# Altium PCB pcb_take2.PcbDoc (part 2 of 3)
Units mm, origin at the board's own origin, x right, y up, seen from the top; angles counter-clockwise.
Board outline 120 x 150 mm, 8 copper layers (Top Layer, Power plane, Mid-Layer 1, Mid-Layer 2, Mid-Layer 3, MidLayer4, GND plane, Bottom Layer); 176 components, 197 nets, 1014 pads, 576 vias.
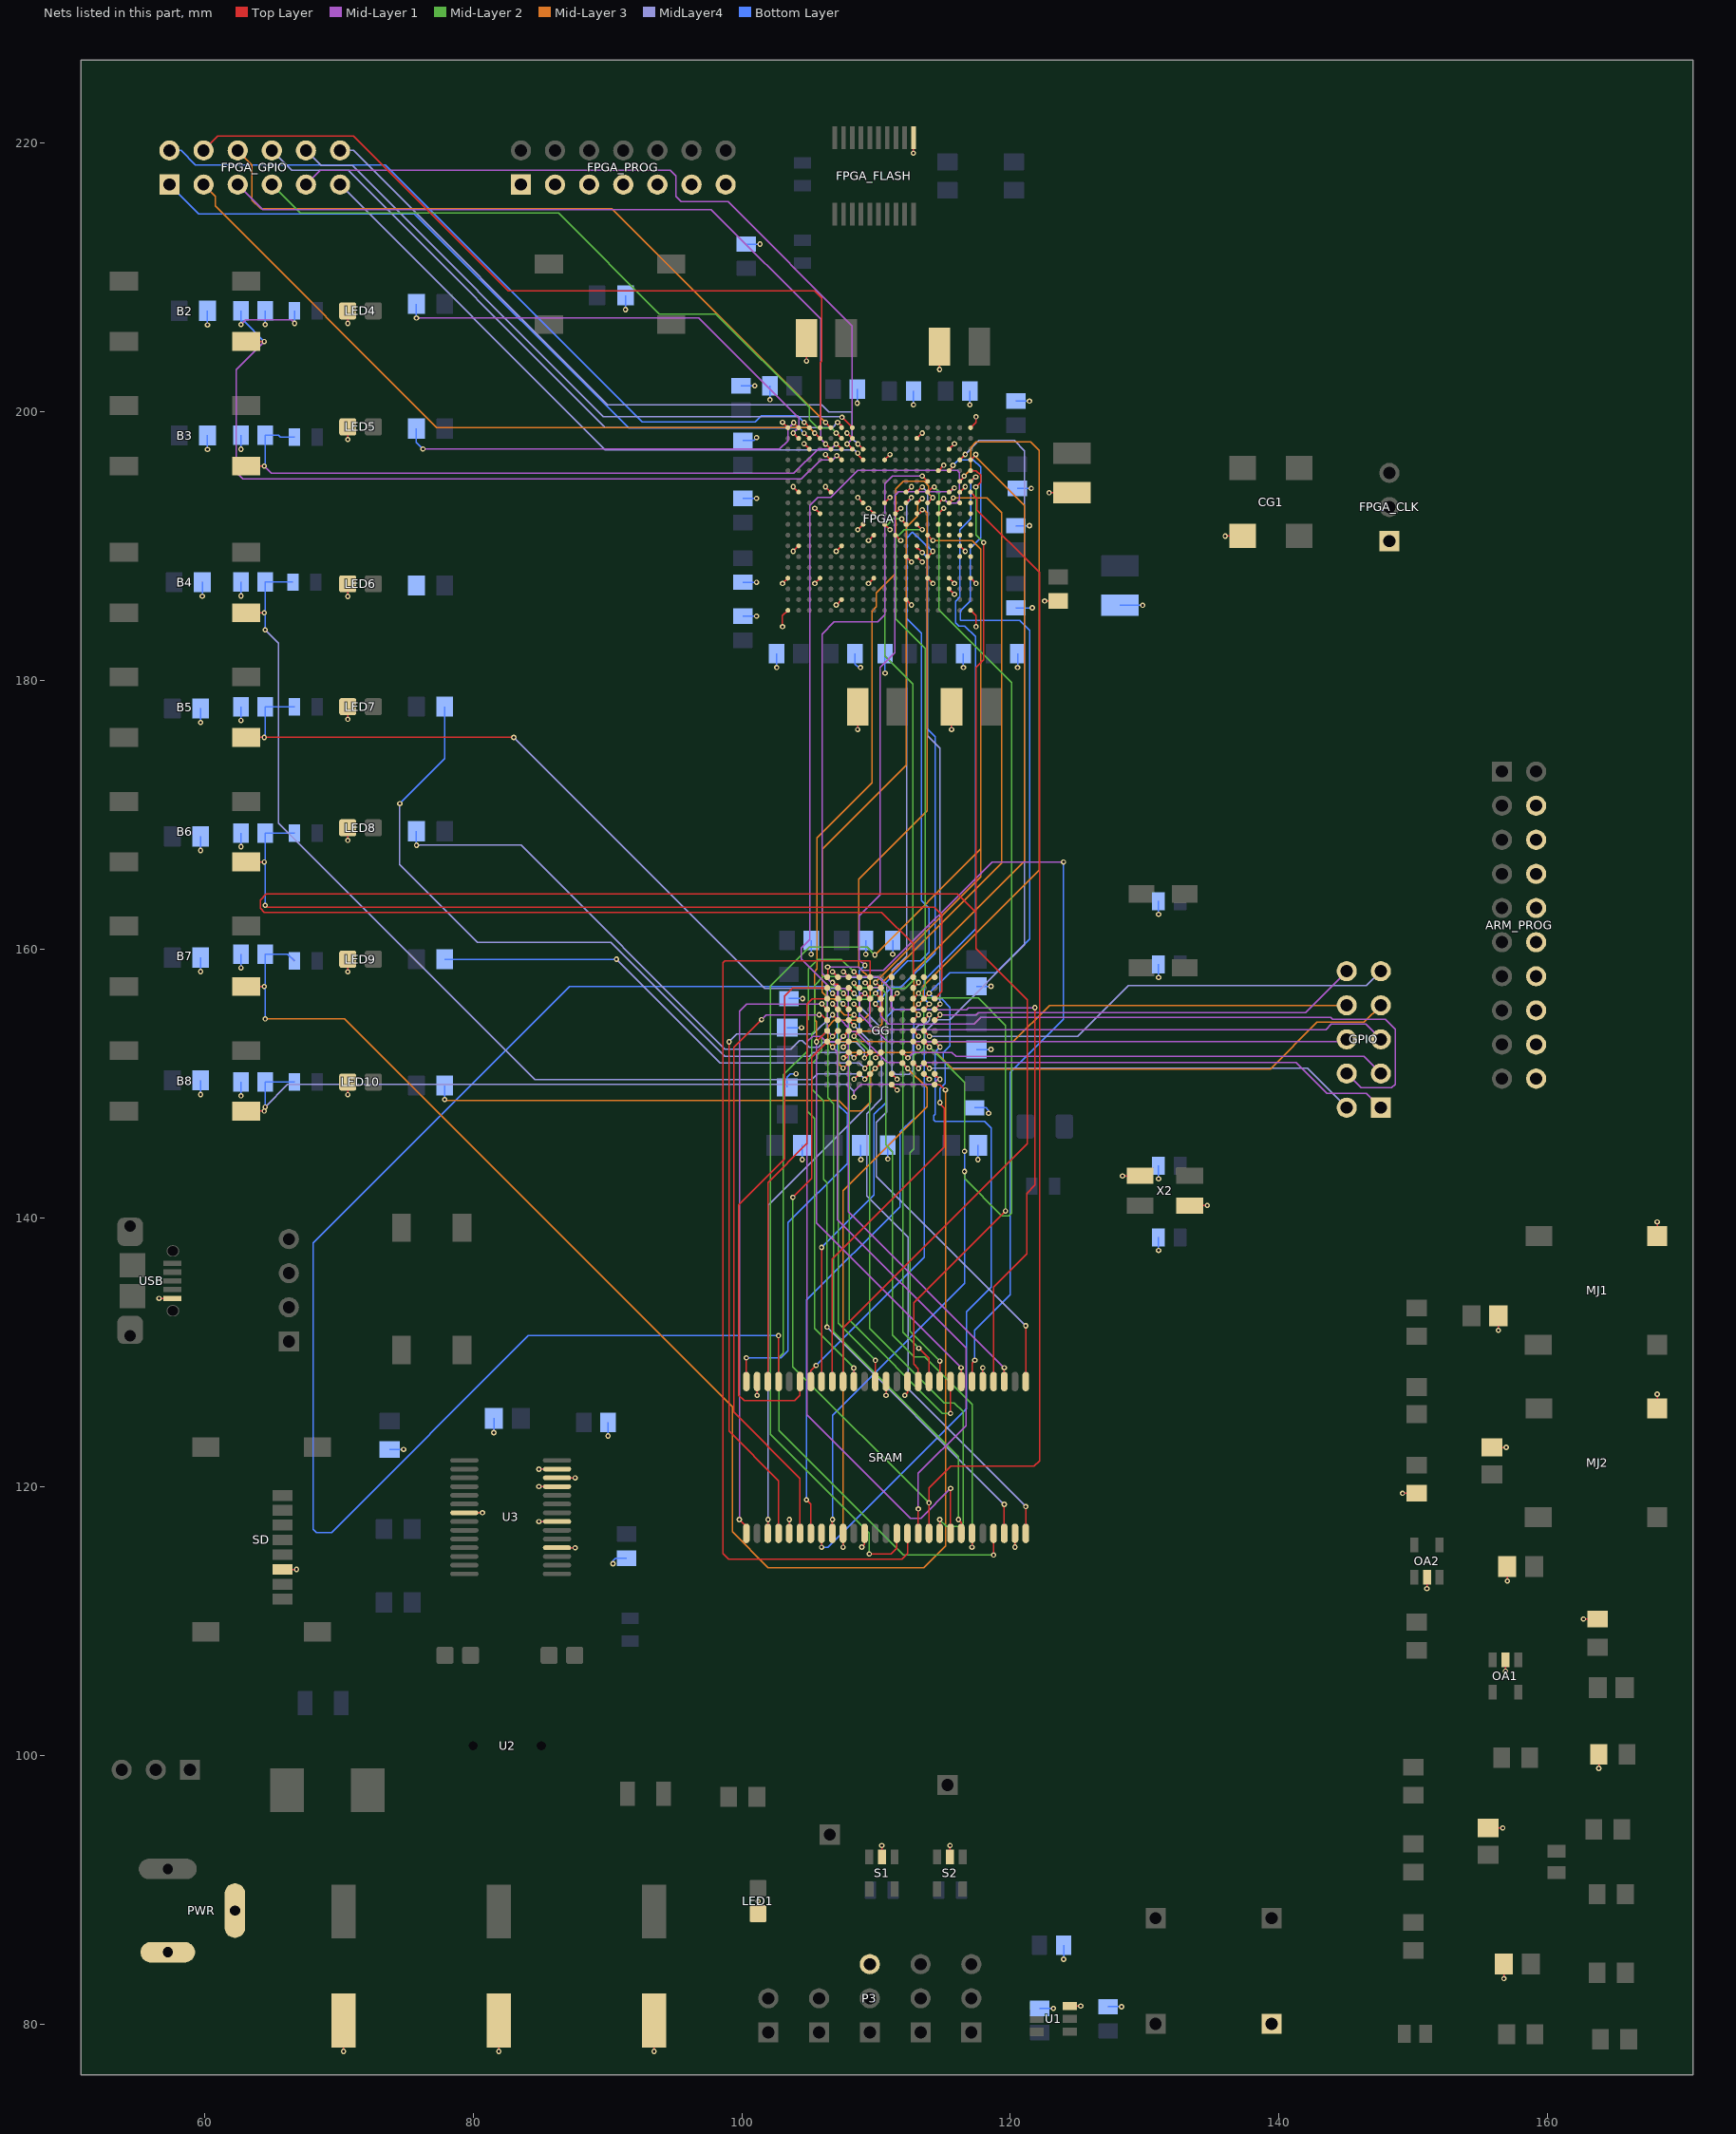
[diagram p8: the nets of this part, all layers, seen from the top]

## Via types
v1: diameter 0.4, hole 0.2, Top Layer to Bottom Layer, 576 vias

## Nets (pads, with @x,y where several pads share a name; then routed paths per layer and width w, separated by ;. In a path a pad name is that pad's centre, name@x,y a point inside that pad or via, vN(x,y) a via of type N, cw(c..) or ccw(c..) an arc to the next point about the centre after c; other vN are vias at no path point) (continued)
EBI_A4: FPGA.F14 GG.J8 SRAM.10 | length 94.8
  Top Layer w0.1: v1(107.544,115.494) SRAM.10@107.544,116.524 ; GG.J8@111.963,151.524 v1(112.363,151.124) ; v1(113.436,195.224) FPGA.F14@113.836,194.824
  Mid-Layer 1 w0.1: v1(112.363,151.124) 111.925,151.562 110.821,151.562 108.509,153.874 108.229,153.874 107.112,154.992 107.112,157.099 105.994,158.217 105.994,183.464 106.883,184.353 110.134,184.353 110.668,184.887 110.668,194.666 111.227,195.224 v1(113.436,195.224)
  Mid-Layer 3 w0.1: v1(107.544,115.494) 107.544,142.041 113.792,148.29 113.792,149.695 v1(112.363,151.124)
EBI_A5: FPGA.G14 GG.G10 SRAM.9 | length 104.3
  Top Layer w0.1: SRAM.9@106.744,116.524 106.744,117.539 v1(106.756,117.551) ; GG.G10@113.563,153.124 v1(113.963,152.724) ; FPGA.G14@113.836,194.024 114.224,194.412 v1(114.325,194.412)
  Mid-Layer 2 w0.1: v1(113.963,152.724) 116.586,150.101 v1(116.586,144.958) ; v1(114.325,194.412) 114.681,194.056 114.681,185.242 120.091,179.832 120.091,140.36 119.888,140.157 119.362,140.157 116.586,142.933 v1(116.586,143.459)
  Bottom Layer w0.1: v1(106.756,117.551) 106.756,125.324 116.586,135.153 v1(116.586,143.459) v1(116.586,144.958)
EBI_A6: FPGA.D17 GG.G11 SRAM.8 | length 103
  Top Layer w0.1: v1(105.944,115.494) SRAM.8@105.944,116.524 ; GG.G11@114.363,153.124 v1(114.763,152.724) ; FPGA.D17@116.236,196.424 v1(116.637,196.825)
  MidLayer4 w0.1: v1(114.763,152.724) 114.35,153.137 113.792,153.137 113.614,153.314 113.614,153.822 114.56,154.768 115.503,154.768 121.056,160.321 121.056,197.104 120.304,197.857 117.669,197.857 v1(116.637,196.825)
  Bottom Layer w0.1: v1(105.944,115.494) 106.429,115.494 116.738,125.803 116.738,133.02 118.567,134.849 118.567,146.71 118.079,147.199 114.402,147.199 114.3,147.3 114.3,147.615 114.402,147.717 114.402,152.363 v1(114.763,152.724)
EBI_A7: FPGA.D18 GG.E9 SRAM.7 | length 90.1
  Top Layer w0.1: v1(104.826,119.024) 105.144,118.706 SRAM.7@105.144,116.524 ; GG.E9@112.763,154.724 v1(113.163,155.124) ; FPGA.D18@117.036,196.424 117.036,196.436 v1(117.424,196.825)
  Mid-Layer 3 w0.1: v1(113.163,155.124) 112.801,155.486 112.801,158.318 121.056,166.573 121.056,193.015 117.424,196.647 v1(117.424,196.825)
  Bottom Layer w0.1: v1(104.826,119.024) 104.826,133.883 111.785,140.843 111.785,146.4 112.801,147.416 112.801,154.762 v1(113.163,155.124)
EBI_A8: FPGA.H12 GG.E10 SRAM.48 | length 82
  Top Layer w0.1: SRAM.48@105.144,127.824 105.144,128.626 v1(105.537,129.019) ; FPGA.H12@112.236,193.224 112.236,193.237 v1(112.624,193.624) ; GG.E10@113.563,154.724 v1(113.963,155.124)
  MidLayer4 w0.1: v1(112.624,193.624) 112.624,193.523 112.268,193.167 112.268,159.505 111.201,158.438 111.201,150.978 111.481,150.698 112.446,150.698 112.725,150.978 112.725,153.873 113.203,154.351 113.589,154.351 113.963,154.725 v1(113.963,155.124)
  Bottom Layer w0.1: v1(105.537,129.019) 113.589,137.07 113.589,154.75 v1(113.963,155.124)
EBI_A9: FPGA.G13 GG.D11 SRAM.47 | length 73.7
  Top Layer w0.1: SRAM.47@105.944,127.824 v1(105.944,137.807) ; FPGA.G13@113.036,194.024 113.424,194.412 v1(113.436,194.412) ; GG.D11@114.363,155.524 v1(114.763,155.924)
  MidLayer4 w0.1: v1(113.436,194.412) 113.843,194.005 113.843,175.895 114.763,174.975 v1(114.763,155.924)
  Bottom Layer w0.1: v1(105.944,137.807) 109.855,141.718 109.855,147.701 110.744,148.59 110.744,154.915 111.354,155.524 114.363,155.524 v1(114.763,155.924)
EBI_A10: FPGA.E16 GG.C10 SRAM.46 | length 87.6
  Top Layer w0.1: SRAM.46@106.744,127.824 106.744,136.931 115.087,145.275 115.087,148.184 114.757,148.514 v1(114.757,148.59) ; v1(113.944,156.718) 113.563,156.337 GG.C10@113.563,156.324 v1(113.957,156.718) ; FPGA.E16@115.436,195.624 115.722,195.91 v1(115.722,196.012)
  Bottom Layer w0.1: v1(113.944,156.718) 114.351,156.312 114.884,156.312 115.513,155.683 115.513,152.826 115.011,152.324 115.011,151.663 115.138,151.536 115.138,150.001 114.757,149.62 v1(114.757,148.59) ; v1(113.957,156.718) 115.481,158.242 118.923,158.242 121.437,160.757 121.437,183.744 120.701,184.48 116.296,184.48 116.27,184.506 116.27,185.18 117.018,185.928 117.018,189.856 117.78,190.618 117.78,195.885 117.246,196.418 116.129,196.418 v1(115.722,196.012)
EBI_A11: FPGA.E18 GG.A9 SRAM.45 | length 183.1
  Top Layer w0.1: SRAM.45@107.544,127.824 107.544,131.826 121.26,145.542 121.26,156.235 117.45,160.045 117.45,162.738 ; GG.A9@112.763,157.924 112.763,160.408 110.414,162.758 64.463,162.758 64.16,163.06 64.16,163.652 64.618,164.109 116.078,164.109 117.45,162.738 ; FPGA.E18@117.036,195.624 117.45,195.624 117.78,195.294 117.78,194.767 v1(117.424,194.412) ; v1(118.008,190.271) 118.008,181.534 117.45,180.975 117.45,162.738
  Mid-Layer 2 w0.1: v1(117.424,194.412) 117.424,190.856 v1(118.008,190.271)
EBI_A12: FPGA.K12 GG.B9 SRAM.44 | length 77.2
  Top Layer w0.1: SRAM.44@108.344,127.824 v1(108.344,128.829) ; v1(111.912,192.024) 111.912,191.948 FPGA.K12@112.236,191.624 ; GG.B9@112.763,157.124 v1(113.163,157.524)
  Mid-Layer 2 w0.1: v1(108.344,128.829) 105.41,131.763 105.41,147.396 104.851,147.955 104.851,151.663 105.207,152.019 105.207,153.695 105.41,153.899 105.41,157.302 106.07,157.963 110.109,157.963 110.973,157.099 112.166,157.099 112.725,157.658 112.725,157.962 ; v1(111.912,192.024) 111.277,192.024 110.668,191.414 110.668,181.813 112.725,179.756 112.725,157.962 ; v1(113.163,157.524) 112.725,157.962
EBI_A13: FPGA.K13 GG.C9 SRAM.38 | length 75.3
  Top Layer w0.1: GG.C9@112.763,156.324 v1(113.163,156.724) ; FPGA.K13@113.036,191.624 113.423,191.237 v1(113.436,191.237) ; SRAM.38@113.144,127.824 113.144,128.79 112.805,129.129 112.805,133.69 v1(119.634,140.518)
  Mid-Layer 2 w0.1: v1(113.436,191.237) 112.116,191.237 111.481,190.602 111.481,184.582 113.655,182.408 113.655,157.216 v1(113.163,156.724) 113.525,156.362 117.602,156.362 119.634,154.33 v1(119.634,140.518)
EBI_A14: FPGA.F17 GG.D9 SRAM.37 | length 83.6
  Top Layer w0.1: GG.D9@112.763,155.524 v1(113.163,155.924) ; v1(113.182,130.302) 113.944,129.54 SRAM.37@113.944,127.824 ; FPGA.F17@116.236,194.824 116.561,195.149 v1(116.561,195.224)
  Mid-Layer 2 w0.1: v1(113.163,155.924) 112.738,155.499 112.141,155.499 111.989,155.346 111.989,131.496 v1(113.182,130.302)
  Mid-Layer 3 w0.1: v1(113.163,155.924) 113.525,156.286 113.525,157.264 122.149,165.887 122.149,197.129 121.514,197.764 117.45,197.764 117.043,197.358 117.043,195.707 v1(116.561,195.224)
EBI_A15: FPGA.F18 GG.D10 SRAM.36 | length 73.3
  Top Layer w0.1: GG.D10@113.563,155.524 v1(113.963,155.924) ; SRAM.36@114.744,127.824 v1(114.744,129.35) ; FPGA.F18@117.036,194.824 117.36,195.148 v1(117.424,195.148)
  Mid-Layer 2 w0.1: v1(113.963,155.924) 113.538,155.499 113.538,152.603 113.208,152.273 112.979,152.273 112.801,152.095 112.801,145.136 112.522,144.856 112.522,131.572 v1(114.744,129.35)
  Bottom Layer w0.1: v1(113.963,155.924) 113.589,156.298 113.589,157.683 117.399,161.493 117.399,183.261 116.608,184.052 116.166,184.052 115.916,184.302 115.916,185.895 116.256,186.234 116.256,191.237 117.069,192.049 117.069,194.793 v1(117.424,195.148)
EBI_A16: FPGA.H13 GG.E4 SRAM.35 | length 79.9
  Top Layer w0.1: v1(108.367,155.12) GG.E4@108.763,154.724 ; FPGA.H13@113.036,193.224 113.352,193.54 v1(113.436,193.54) ; v1(115.544,125.451) SRAM.35@115.544,127.824
  Mid-Layer 2 w0.1: v1(108.367,155.12) 108.001,154.754 108.001,132.398 114.949,125.451 v1(115.544,125.451)
  Mid-Layer 3 w0.1: v1(108.367,155.12) 107.643,155.12 107.112,155.651 107.112,156.083 106.883,156.312 106.477,156.312 105.994,156.794 105.994,167.437 112.243,173.685 112.243,191.414 113.081,192.253 113.081,193.184 v1(113.436,193.54)
EBI_A17: FPGA.H14 GG.F1 SRAM.34 | length 79
  Top Layer w0.1: v1(105.562,153.111) 105.562,153.123 GG.F1@106.363,153.924 ; FPGA.H14@113.836,193.224 v1(114.23,193.618) ; v1(116.332,128.854) 116.344,128.842 SRAM.34@116.344,127.824
  Mid-Layer 1 w0.1: v1(105.562,153.111) 105.562,139.624 v1(116.332,128.854)
  Mid-Layer 3 w0.1: v1(105.562,153.111) 105.562,154.615 105.416,154.762 105.416,158.324 105.613,158.521 105.613,168.303 109.703,172.393 109.703,185.166 110.033,185.496 110.033,186.523 111.481,187.971 111.481,194.259 112.039,194.818 113.589,194.818 113.919,194.488 113.919,193.929 v1(114.23,193.618)
EBI_A18: FPGA.H15 GG.F2 SRAM.21 | length 98.8
  Top Layer w0.1: v1(106.756,153.518) GG.F2@107.163,153.924 ; FPGA.H15@114.636,193.224 114.952,193.54 v1(115.037,193.54) ; v1(116.129,117.551) 116.344,117.336 SRAM.21@116.344,116.524
  Mid-Layer 1 w0.1: v1(106.756,153.518) 106.375,153.899 106.375,157.335 104.445,159.265 104.445,160.078 105.08,160.713 105.08,193.04 105.664,193.624 106.629,193.624 108.636,195.631 116.053,195.631 116.205,195.478 116.205,193.446 115.976,193.218 115.359,193.218 v1(115.037,193.54)
  Mid-Layer 2 w0.1: v1(106.756,153.518) 106.401,153.162 106.401,148.946 106.832,148.514 106.832,131.521 116.129,122.225 v1(116.129,117.551)
EBI_A19: FPGA.H16 GG.F3 SRAM.20 | length 99.3
  Top Layer w0.1: v1(107.563,153.524) GG.F3@107.963,153.924 ; FPGA.H16@115.436,193.224 115.748,193.536 v1(115.748,193.599) ; SRAM.20@115.544,116.524 v1(115.545,119.862)
  Mid-Layer 1 w0.1: v1(107.563,153.524) 107.176,153.137 106.288,153.137 105.893,153.532 105.272,153.532 104.858,153.118 104.858,125.342 112.547,117.653 113.335,117.653 v1(115.545,119.862)
  Mid-Layer 3 w0.1: v1(107.563,153.524) 107.938,153.899 109.906,153.899 110.439,154.432 110.439,157.513 119.355,166.429 119.355,192.507 118.262,193.599 v1(115.748,193.599)
EBI_A20: FPGA.G16 GG.F4 SRAM.19 | length 90.7
  Top Layer w0.1: v1(108.363,153.524) GG.F4@108.763,153.924 ; v1(114.732,117.551) 114.744,117.539 SRAM.19@114.744,116.524 ; FPGA.G16@115.436,194.024 115.752,194.34 v1(115.824,194.34)
  Mid-Layer 1 w0.1: v1(109.169,158.801) 108.763,159.207 108.763,162.484 110.312,164.033 110.312,180.975 111.404,182.067 111.404,193.777 111.684,194.056 115.54,194.056 v1(115.824,194.34)
  Mid-Layer 2 w0.1: v1(108.363,153.524) 109.519,152.368 109.519,131.794 115.076,126.238 115.824,126.238 116.484,125.578 116.484,117.272 116.256,117.043 115.24,117.043 v1(114.732,117.551)
  Bottom Layer w0.1: v1(108.363,153.524) 108.763,153.924 108.763,158.394 v1(109.169,158.801)
EBI_A21: FPGA.G18 GG.G1 SRAM.18 | length 126.3
  Top Layer w0.1: v1(103.81,141.529) 105.212,142.931 105.212,151.973 GG.G1@106.363,153.124 ; SRAM.18@113.944,116.524 v1(113.944,118.796) 113.944,119.888 115.57,121.514 121.768,121.514 122.174,121.92 122.174,188.036 117.526,192.684 117.526,193.534 FPGA.G18@117.036,194.024
  Mid-Layer 2 w0.1: v1(103.81,141.529) 103.81,128.93 v1(113.944,118.796)
EBI_A22: FPGA.J13 GG.G2 SRAM.17 | length 88.3
  Top Layer w0.1: v1(106.756,152.73) v1@106.769,152.73 ; v1(106.763,152.724) v1@106.769,152.73 ; GG.G2@107.163,153.124 v1@106.769,152.73 ; FPGA.J13@113.036,192.424 113.233,192.424 v1(113.436,192.71) ; SRAM.17@113.144,116.524 v1(113.144,118.339)
  Mid-Layer 1 w0.1: v1(106.763,152.724) 107.137,152.35 107.137,139.878 116.688,130.327 116.688,124.549 113.144,121.006 v1(113.144,118.339)
  Mid-Layer 3 w0.1: v1(106.756,152.73) 106.401,153.086 106.401,154.229 106.883,154.711 109.017,154.711 109.55,155.245 109.55,157.81 108.712,158.648 108.712,165.227 113.792,170.307 113.792,192.481 113.563,192.71 v1(113.436,192.71)
EBI_AD0: GG.B4 SRAM.22 | length 48.7
  Top Layer w0.1: v1(108.356,157.48) 108.712,157.124 GG.B4@108.763,157.124 ; v1(117.145,115.494) SRAM.22@117.144,116.524
  Mid-Layer 2 w0.1: v1(108.356,157.48) 108.356,157.277 108.509,157.124 110.338,157.124 110.719,156.743 110.719,145.44 111.227,144.932 111.227,131.267 112.852,129.642 113.614,129.642 117.145,126.111 v1(117.145,115.494)
EBI_AD1: GG.A4 SRAM.24 | length 61.4
  Top Layer w0.1: v1(108.356,158.318) 108.369,158.318 GG.A4@108.763,157.924 ; v1(118.744,114.91) SRAM.24@118.744,116.524
  Mid-Layer 2 w0.1: v1(108.356,158.318) 107.417,159.258 105.664,159.258 104.953,158.547 104.953,154.784 104.853,154.684 104.853,152.393 103.099,150.639 103.099,129.946 102.768,129.616 102.768,124.181 112.039,114.91 v1(118.744,114.91)
EBI_AD2: GG.C3 SRAM.25 | length 48.9
  Top Layer w0.1: v1(107.569,156.718) GG.C3@107.963,156.324 ; SRAM.25@119.544,116.524 v1(119.544,118.683)
  Mid-Layer 2 w0.1: v1(106.35,131.877) 106.35,142.621 106.096,142.875 106.096,148.697 105.212,149.581 105.212,151.466 105.639,151.892 105.639,152.121 105.969,152.451 105.969,153.518 106.324,153.873 106.324,156.87 106.629,157.175 107.112,157.175 v1(107.569,156.718)
  MidLayer4 w0.1: v1(106.35,131.877) v1(119.544,118.683)
EBI_AD3: GG.B3 SRAM.27 | length 47
  Top Layer w0.1: GG.B3@107.963,157.124 v1(108.369,156.718) ; SRAM.27@121.144,116.524 v1(121.144,118.516)
  MidLayer4 w0.1: v1(108.369,156.718) 108.737,156.35 108.737,155.778 110.414,154.102 110.414,148.869 109.296,147.752 109.296,141.63 112.37,138.557 112.37,127.291 v1(121.144,118.516)
EBI_AD4: GG.A3 SRAM.28 | length 38.7
  Top Layer w0.1: v1(107.569,158.318) GG.A3@107.963,157.924 ; SRAM.28@121.144,127.824 v1(121.144,131.967)
  MidLayer4 w0.1: v1(107.569,158.318) 108.001,157.886 110.287,157.886 110.803,157.371 110.803,147.91 110.009,147.117 110.009,143.102 v1(121.144,131.967)
EBI_AD5: GG.B2 SRAM.30 | length 36
  Top Layer w0.1: v1(106.756,157.531) 106.808,157.531 106.944,157.395 107.163,157.395 GG.B2@107.163,157.124 ; SRAM.30@119.544,127.824 v1(119.544,128.854)
  Mid-Layer 1 w0.1: v1(106.756,157.531) 107.188,157.099 107.696,157.099 107.925,156.87 107.925,140.474 v1(119.544,128.854)
EBI_AD6: GG.A2 SRAM.31 | length 46.7
  Top Layer w0.1: v1(106.756,158.318) 106.769,158.318 GG.A2@107.163,157.924 ; SRAM.31@118.744,127.824 118.744,134.849 121.209,137.313 121.209,141.834 121.818,142.443 v1(121.818,155.651)
  Mid-Layer 1 w0.1: v1(106.756,158.318) 107.112,157.963 110.134,157.963 111.098,156.999 111.098,155.754 111.354,155.499 116.738,155.499 116.891,155.651 v1(121.818,155.651)
EBI_AD7: GG.A1 SRAM.33 | length 63.3
  Top Layer w0.1: GG.A1@106.363,157.924 106.401,157.962 v1(106.401,158.674) ; SRAM.33@117.144,127.824 117.144,129.209 v1(117.348,129.413)
  Mid-Layer 1 w0.1: v1(106.401,158.674) 108.712,158.674 108.966,158.42 110.566,158.42 118.643,166.497 v1(123.952,166.497)
  Bottom Layer w0.1: v1(117.348,129.413) 117.348,131.648 119.99,134.29 119.99,150.825 123.952,154.788 v1(123.952,166.497)
EBI_AD8: GG.B1 SRAM.49 | length 40.5
  Top Layer w0.1: SRAM.49@104.344,127.824 104.344,126.797 103.938,126.39 100.178,126.39 99.771,126.797 99.771,140.963 103.2,144.392 103.2,156.515 103.809,157.124 GG.B1@106.363,157.124
EBI_AD9: GG.C2 SRAM.51 | length 112.9
  Top Layer w0.1: v1(102.743,131.242) v1(102.743,131.242) SRAM.51@102.744,127.824 ; v1(106.756,156.718) 106.769,156.718 GG.C2@107.163,156.324
  Bottom Layer w0.1: v1(102.743,131.242) 84.125,131.242 69.469,116.586 68.351,116.586 68.097,116.84 68.097,138.151 87.173,157.226 106.248,157.226 v1(106.756,156.718)
EBI_AD10: GG.C1 SRAM.52 | length 31
  Top Layer w0.1: SRAM.52@101.944,127.824 101.944,142.635 104.858,145.549 104.858,155.925 105.258,156.324 GG.C1@106.363,156.324
EBI_AD11: GG.D2 SRAM.54 | length 33.8
  Top Layer w0.1: SRAM.54@100.344,127.824 v1(100.344,129.591) ; v1(106.756,155.931) GG.D2@107.163,155.524
  Bottom Layer w0.1: v1(100.344,129.591) 102.921,129.591 103.452,130.122 103.452,139.647 107.848,144.043 107.848,147.752 107.137,148.463 107.137,155.55 v1(106.756,155.931)
EBI_AD12: GG.D1 SRAM.1 | length 46
  Top Layer w0.1: v1(99.822,117.551) 100.344,117.029 SRAM.1@100.344,116.524 ; v1(105.969,155.931) 105.969,155.918 GG.D1@106.363,155.524
  Mid-Layer 1 w0.1: v1(99.822,117.551) 99.822,155.372 100.381,155.931 v1(105.969,155.931)
EBI_AD13: GG.E3 SRAM.3 | length 42
  Top Layer w0.1: SRAM.3@101.944,116.524 101.944,117.54 v1(101.956,117.551) ; GG.E3@107.963,154.724 v1(108.358,154.329)
  MidLayer4 w0.1: v1(101.956,117.551) 101.956,140.919 109.525,148.488 109.525,153.162 v1(108.358,154.329)
EBI_AD14: GG.E2 SRAM.4 | length 47.2
  Top Layer w0.1: v1(99.06,153.111) 99.06,124.13 102.744,120.446 SRAM.4@102.744,116.524 ; v1(106.756,155.118) 106.769,155.118 GG.E2@107.163,154.724
  MidLayer4 w0.1: v1(99.06,153.111) 99.628,153.679 105.317,153.679 v1(106.756,155.118)
EBI_AD15: GG.E1 SRAM.6 | length 46.3
  Top Layer w0.1: v1(101.473,154.762) 99.416,152.705 99.416,125.552 104.344,120.624 SRAM.6@104.344,116.524 ; v1(105.766,155.118) 105.969,155.118 GG.E1@106.363,154.724
  Mid-Layer 1 w0.1: v1(101.473,154.762) 101.829,155.118 v1(105.766,155.118)
EBI_CS0: FPGA.M13 GG.D6 | length 37.5
  Top Layer w0.1: v1(109.957,155.931) GG.D6@110.363,155.524 ; FPGA.M13@113.036,190.024 113.036,189.814 113.157,189.814 v1(113.436,189.535)
  Bottom Layer w0.1: v1(109.957,155.931) 111.2,157.174 111.844,157.174 114.386,159.715 114.386,175.82 113.792,176.413 113.792,189.179 v1(113.436,189.535)
EBI_CS1: GG.A5 SRAM.16 | length 71.8
  Top Layer w0.1: GG.A5@109.563,157.924 109.563,159.107 109.519,159.151 98.755,159.151 98.603,158.998 98.603,115.011 99.009,114.605 111.938,114.605 112.344,115.011 SRAM.16@112.344,116.524
EBI_D0: FPGA.N18
EBI_D1: FPGA.N17
EBI_D2: FPGA.M18
EBI_D3: FPGA.M16
EBI_D4: FPGA.L18
EBI_D5: FPGA.L17
EBI_D6: FPGA.K18
EBI_D7: FPGA.K17
EBI_D8: FPGA.J18
EBI_D9: FPGA.J16
EBI_D10: FPGA.H18
EBI_D11: FPGA.H17
EBI_D12: FPGA.L16
EBI_D13: FPGA.L15
EBI_D14: FPGA.K16
EBI_D15: FPGA.K15
EBI_REN: FPGA.N14 GG.C6 SRAM.42 | length 73
  Top Layer w0.1: SRAM.42@109.944,127.824 v1(109.944,129.4) ; v1(109.963,156.724) GG.C6@110.363,156.324 ; FPGA.N14@113.836,189.224 v1(114.23,189.618)
  Mid-Layer 2 w0.1: v1(109.944,129.4) 107.188,132.156 107.188,156.058 107.417,156.286 109.525,156.286 v1(109.963,156.724)
  Bottom Layer w0.1: v1(109.963,156.724) 112.357,159.118 113.288,159.118 113.944,159.775 113.944,163.043 113.36,163.627 113.36,183.515 112.268,184.607 112.268,190.602 112.7,191.033 v1(114.23,189.618)
EBI_WEN: FPGA.L14 GG.B6 SRAM.15 | length 109.5
  Top Layer w0.1: v1(109.499,114.986) 111.112,114.986 111.544,115.418 SRAM.15@111.544,116.524 ; v1(109.956,157.531) GG.B6@110.363,157.124 ; FPGA.L14@113.836,190.824 v1(114.236,190.424)
  Mid-Layer 2 w0.1: v1(109.499,114.986) 109.499,116.535 102.133,123.901 102.133,157.251 105.035,160.153 109.341,160.153 v1(109.918,159.576)
  Mid-Layer 3 w0.1: v1(109.918,159.576) 117.805,167.462 ; v1(109.956,157.531) 117.805,165.38 117.805,167.462 ; v1(114.236,190.424) 117.17,190.424 117.805,189.789 117.805,167.462
GND: 1.2 2.2 3.2 ARM_PROG.4 ARM_PROG.6 ARM_PROG.8 ARM_PROG.10 ARM_PROG.12 ARM_PROG.14 ARM_PROG.16 ARM_PROG.18 ARM_PROG.20 C1.2 C2.1 C3.1 C4.1 C5.1 C6.1 C7.1 C8.1 C9.1 C10.1 C11.1 C12.1 C13.1 C14.1 C15.1 C16.1 C17.1 C18.1 C19.1 C20.1 C21.1 C22.1 C23.1 C24.1 C25.1 C26.1 C27.1 C28.1 C29.1 C30.1 C31.1 C32.1 C33.1 C34.1 C35.1 C36.1 C37.1 C38.1 C39.1 C40.1 C41.2 C42.2 C43.2 C44.1 C45.2 C46.2 C47.2 C48.2 C49.1 C50.2 C51.1 C52.1 C53.1 C54.1 C55.1 C56.1 C57.1 C58.1 C61.2 C64.2 C65.1 CG1.2 FPGA.A1 FPGA.A18 FPGA.B7 FPGA.B13 FPGA.C3 FPGA.C16 FPGA.D5 FPGA.D10 FPGA.E15 FPGA.G2 FPGA.G5 FPGA.G12 FPGA.G17 FPGA.H8 FPGA.H10 FPGA.J4 FPGA.J9 FPGA.J11 FPGA.J15 FPGA.K8 FPGA.K10 FPGA.L9 FPGA.L11 FPGA.M2 FPGA.M6 FPGA.M17 FPGA.N12 FPGA.N13 FPGA.R1 FPGA.R4 FPGA.R9 FPGA.R14 FPGA.R16 FPGA.R18 FPGA.T16 FPGA.U6 FPGA.U12 FPGA.V1 FPGA.V18 FPGA_CLK.1 FPGA_FLASH.11 FPGA_PROG.1 FPGA_PROG.3 FPGA_PROG.5 FPGA_PROG.7 FPGA_PROG.9 FPGA_PROG.11 FPGA_PROG.13 GG.C7 GG.D4 GG.F9 GG.G3 GG.G9 GG.H6 GG.K4 GG.K7 GG.K10 GG.L7 GND.1 LED1.K LED4.K LED5.K LED6.K LED7.K LED8.K LED9.K LED10.K MJ1.3 MJ2.3 OA1.2 OA2.2 P3.3 PWR.2 PWR.3 R8.2 R11.2 R14.2 R20.2 R21.2 R22.2 R23.2 R24.2 R31.1 R37.2 R39.1 R48.2 S1.2 S2.2 SD.6 SRAM.5 SRAM.12 SRAM.26 SRAM.32 SRAM.39 SRAM.41 SRAM.53 U1.6 U2.2 U3.7 U3.18 U3.21 U3.25 U3.26 U3.27 USB.5 X2.2 X2.4 | length 154.6
  Top Layer w0.1: v1(56.633,134.016) USB.5@57.608,134.016 ; SD.6@65.811,113.836 v1(66.861,113.836) ; v1(70.358,77.964) C46.2@70.358,80.264 ; v1(70.675,149.179) LED10.K@70.675,150.114 ; v1(70.675,158.323) LED9.K@70.675,159.258 ; v1(70.675,168.102) LED8.K@70.675,169.037 ; v1(70.675,177.119) LED7.K@70.675,178.054 ; v1(70.675,186.263) LED6.K@70.675,187.198 ; v1(70.675,197.947) LED5.K@70.675,198.882 ; v1(70.675,206.583) LED4.K@70.675,207.518 ; U3.7@79.354,118.054 v1(80.704,118.054) ; v1(81.915,77.964) C47.2@81.915,80.264 ; v1(84.904,117.404) U3.21@86.254,117.404 ; v1(84.904,120.004) U3.25@86.254,120.004 ; v1(84.904,121.304) U3.27@86.254,121.304 ; U3.18@86.254,115.454 v1(87.604,115.454) ; U3.26@86.254,120.654 v1(87.604,120.654) ; v1(93.472,77.964) C48.2@93.472,80.264 ; v1(101.144,126.799) SRAM.53@101.144,127.824 ; LED1.K@101.219,88.201 v1(101.219,89.137) ; v1(103.036,184.011) 103.036,184.824 FPGA.V1@103.436,185.224 ; v1(103.036,187.224) FPGA.R1@103.436,187.624 ; v1(103.036,199.224) FPGA.A1@103.436,198.824 ; SRAM.5@103.544,116.524 v1(103.544,117.549) ; v1(103.836,189.624) FPGA.M2@104.236,190.024 ; v1(103.836,194.424) FPGA.G2@104.236,194.024 ; v1(104.636,197.624) FPGA.C3@105.036,197.224 ; v1(104.824,203.786) C10.1@104.824,205.486 ; v1(105.436,187.224) FPGA.R4@105.836,187.624 ; v1(105.436,192.824) FPGA.J4@105.836,192.424 ; v1(106.236,194.424) FPGA.G5@106.636,194.024 ; v1(106.236,196.824) FPGA.D5@106.636,196.424 ; v1(107.036,185.624) FPGA.U6@107.436,186.024 ; v1(107.036,189.624) FPGA.M6@107.436,190.024 ; v1(107.563,152.724) GG.G3@107.963,153.124 ; v1(107.836,198.424) FPGA.B7@108.236,198.024 ; v1(108.363,150.324) GG.K4@108.763,150.724 ; v1(108.363,155.924) GG.D4@108.763,155.524 ; v1(108.634,176.354) C6.1@108.634,178.054 ; v1(108.636,191.224) FPGA.K8@109.036,191.624 ; v1(108.636,193.624) FPGA.H8@109.036,193.224 ; v1(108.941,115.499) 109.144,115.702 SRAM.12@109.144,116.524 ; v1(109.436,187.224) FPGA.R9@109.836,187.624 ; v1(109.436,190.424) FPGA.L9@109.836,190.824 ; v1(109.436,192.824) FPGA.J9@109.836,192.424 ; v1(109.963,151.924) GG.H6@110.363,152.324 ; S1.2@110.429,92.443 v1(110.429,93.293) ; FPGA.K10@110.636,191.624 v1(111.036,191.224) ; FPGA.H10@110.636,193.224 v1(111.036,193.624) ; FPGA.D10@110.636,196.424 v1(111.036,196.824) ; v1(110.744,126.799) SRAM.41@110.744,127.824 ; GG.L7@111.163,149.924 v1(111.563,149.524) ; GG.K7@111.163,150.724 v1(111.563,150.324) ; GG.C7@111.163,156.324 v1(111.563,156.724) ; FPGA.L11@111.436,190.824 v1(111.836,190.424) ; FPGA.J11@111.436,192.424 v1(111.836,192.824) ; v1(112.141,126.799) 112.344,127.002 SRAM.39@112.344,127.824 ; FPGA.U12@112.236,186.024 v1(112.636,185.624) ; FPGA.N12@112.236,189.224 v1(112.636,188.824) ; FPGA.G12@112.236,194.024 v1(112.636,194.424) ; GG.G9@112.763,153.124 v1(113.163,152.724) ; GG.F9@112.763,153.924 v1(113.163,153.524) ; v1(112.78,219.251) FPGA_FLASH.11@112.78,220.401 ; FPGA.N13@113.036,189.224 v1(113.436,188.824) ; FPGA.B13@113.036,198.024 v1(113.436,198.424) ; GG.K10@113.563,150.724 v1(113.963,150.324) ; FPGA.R14@113.836,187.624 v1(114.236,187.224) ; FPGA.J15@114.636,192.424 v1(115.036,192.824) ; FPGA.E15@114.636,195.624 v1(115.036,196.024) ; v1(114.73,203.151) C19.1@114.73,204.851 ; FPGA.T16@115.436,186.824 v1(115.836,186.424) ; FPGA.R16@115.436,187.624 v1(115.836,187.224) ; FPGA.C16@115.436,197.224 v1(115.836,197.624) ; S2.2@115.509,92.443 v1(115.509,93.293) ; v1(115.619,176.354) C2.1@115.619,178.054 ; FPGA.M17@116.236,190.024 v1(116.636,189.624) ; FPGA.G17@116.236,194.024 v1(116.636,194.424) ; FPGA.V18@117.036,185.224 117.436,184.824 v1(117.436,184.011) ; FPGA.R18@117.036,187.624 v1(117.436,187.224) ; FPGA.A18@117.036,198.824 117.436,199.224 v1(117.436,199.63) ; SRAM.32@117.944,127.824 v1(117.944,128.849) ; v1(120.344,115.499) SRAM.26@120.344,116.524 ; v1(122.546,185.917) C7.1@123.571,185.917 ; v1(122.887,193.978) C23.1@124.587,193.978 ; U1.6@124.415,81.341 v1(125.24,81.341) ; v1(128.35,143.129) X2.2@129.65,143.129 ; X2.4@133.35,140.929 v1(134.65,140.929) ; v1(135.987,190.754) CG1.2@137.287,190.754 ; v1(149.191,119.507) R39.1@150.241,119.507 ; v1(151.003,112.411) OA2.2@151.003,113.261 ; 1.2@155.575,94.599 v1(156.65,94.599) ; 3.2@155.829,122.92 v1(156.904,122.92) ; v1(156.321,131.64) C61.2@156.321,132.715 ; v1(156.734,83.38) C64.2@156.734,84.455 ; v1(156.845,106.268) OA1.2@156.845,107.118 ; v1(156.988,112.971) 2.2@156.988,114.046 ; v1(162.653,110.143) R37.2@163.703,110.143 ; v1(163.796,99.026) R31.1@163.796,100.076 ; MJ2.3@168.148,125.829 v1(168.148,126.879) ; MJ1.3@168.148,138.656 v1(168.148,139.706)
  Bottom Layer w0.1: v1(59.724,149.191) R24.2@59.724,150.241 ; v1(59.724,158.335) R23.2@59.724,159.385 ; v1(59.724,167.352) R22.2@59.724,168.402 ; v1(59.724,176.877) R21.2@59.724,177.927 ; v1(59.851,186.275) R20.2@59.851,187.325 ; v1(60.232,197.197) R14.2@60.232,198.247 ; v1(60.232,206.468) R11.2@60.232,207.518 ; v1(62.727,149.089) C58.1@62.727,150.114 ; v1(62.727,158.614) C57.1@62.727,159.639 ; v1(62.727,167.631) C56.1@62.727,168.656 ; v1(62.727,177.029) C55.1@62.727,178.054 ; v1(62.727,186.3) C54.1@62.727,187.325 ; v1(62.727,197.222) C53.1@62.727,198.247 ; v1(64.527,206.493) C52.1@64.527,207.518 ; R8.2@73.787,122.775 v1(74.837,122.775) ; v1(81.55,124.02) C50.2@81.55,125.095 ; v1(90.054,123.77) C49.1@90.054,124.795 ; v1(90.415,114.264) 90.415,114.458 90.627,114.67 C51.1@91.44,114.67 ; v1(91.347,207.611) R48.2@91.347,208.661 ; C4.1@99.949,201.941 v1(100.974,201.941) ; C13.1@100.076,184.796 v1(101.101,184.796) ; C12.1@100.076,187.314 v1(101.101,187.314) ; C3.1@100.076,193.559 v1(101.101,193.559) ; C5.1@100.076,197.877 100.898,197.877 v1(101.101,198.08) ; C65.1@100.33,212.482 v1(101.355,212.482) ; v1(102.097,200.905) C24.1@102.097,201.93 ; v1(102.605,180.966) C25.1@102.605,181.991 ; C37.1@103.378,149.717 103.378,150.479 103.632,150.733 v1(104.047,150.733) ; C38.1@103.378,154.162 v1(104.453,154.162) ; C28.1@103.505,156.326 v1(104.53,156.326) ; v1(104.505,144.34) C33.1@104.505,145.415 ; v1(105.167,159.63) C29.1@105.167,160.655 ; C26.1@108.437,181.991 108.437,181.241 108.712,180.966 v1(108.844,180.966) ; v1(108.596,200.651) C22.1@108.596,201.676 ; v1(108.865,144.34) C32.1@108.865,145.415 ; v1(109.231,159.63) C27.1@109.231,160.655 ; v1(110.67,180.56) C11.1@110.67,181.991 ; v1(110.876,144.39) C31.1@110.876,145.415 ; v1(111.241,159.63) C30.1@111.241,160.655 ; v1(112.787,200.524) C21.1@112.787,201.549 ; v1(116.502,180.966) C9.1@116.502,181.991 ; v1(116.978,200.524) C20.1@116.978,201.549 ; C1.2@117.348,148.198 118.17,148.198 118.373,147.995 v1(118.373,147.792) ; C35.1@117.475,152.543 v1(118.55,152.543) ; C36.1@117.475,157.242 v1(118.55,157.242) ; v1(117.586,144.34) C34.1@117.586,145.415 ; C15.1@120.396,185.409 v1(121.624,185.409) ; C16.1@120.396,191.527 v1(121.421,191.527) ; C18.1@120.396,200.798 v1(121.421,200.798) ; C17.1@120.523,194.299 v1(121.548,194.299) ; v1(120.534,180.966) C8.1@120.534,181.991 ; C44.1@122.174,81.164 v1(123.199,81.164) ; v1(123.963,84.827) C45.2@123.963,85.852 ; C43.2@127.254,81.291 v1(128.279,81.291) ; C14.1@128.143,185.596 v1(129.843,185.596) ; v1(131.026,137.582) C42.2@131.026,138.557 ; v1(131.026,142.916) C41.2@131.026,143.891 ; v1(131.026,157.902) C40.1@131.026,158.877 ; v1(131.026,162.601) C39.1@131.026,163.576
GPIO0: R25.2
GPIO1: GG.H4 R26.2 | length 53.7
  Top Layer w0.1: v1(108.356,151.917) GG.H4@108.763,152.324
  MidLayer4 w0.1: v1(74.549,170.84) 74.549,166.319 80.34,160.528 90.246,160.528 98.755,152.019 105.029,152.019 105.308,152.298 107.975,152.298 v1(108.356,151.917)
  Bottom Layer w0.1: v1(74.549,170.84) 77.885,174.176 R26.2@77.885,178.054
GPIO2: GG.H5 R27.2 | length 42.7
  Top Layer w0.1: v1(109.144,151.917) 109.156,151.917 GG.H5@109.563,152.324
  MidLayer4 w0.1: v1(75.794,167.742) 83.566,167.742 98.73,152.578 103.662,152.578 104.297,153.213 104.521,153.213 105.029,152.705 105.715,152.705 106.096,153.086 108.509,153.086 109.144,152.451 v1(109.144,151.917)
  Bottom Layer w0.1: R27.2@75.785,168.783 75.785,167.75 v1(75.794,167.742)
GPIO3: GG.J5 R28.2 | length 35.2
  Top Layer w0.1: v1(109.169,151.13) GG.J5@109.563,151.524
  MidLayer4 w0.1: v1(90.678,159.258) 98.4,151.536 108.763,151.536 v1(109.169,151.13)
  Bottom Layer w0.1: R28.2@77.885,159.258 v1(90.678,159.258)
GPIO4: GG.J6 R29.2 | length 36.6
  Top Layer w0.1: v1(109.925,151.124) 109.963,151.124 GG.J6@110.363,151.524
  Mid-Layer 3 w0.1: v1(77.885,148.819) 77.961,148.742 107.225,148.742 108.013,147.955 108.915,147.955 109.601,148.641 109.601,150.8 v1(109.925,151.124)
  Bottom Layer w0.1: v1(77.885,148.819) R29.2@77.885,149.86
GPIO5: B4.1 C54.2 GG.K5 R15.1 | length 74.3
  Top Layer w0.1: B4.1@63.119,185.039 v1(64.465,185.039) ; v1(109.163,150.324) GG.K5@109.563,150.724
  MidLayer4 w0.1: v1(64.527,183.769) 65.507,182.789 65.507,169.393 84.607,150.292 105.207,150.292 105.639,150.724 108.763,150.724 v1(109.163,150.324)
  Bottom Layer w0.1: v1(64.465,185.039) v1@64.527,185.101 ; v1(64.527,183.769) v1@64.527,185.101 ; R15.1@66.587,187.325 C54.2@64.527,187.325 v1@64.527,185.101
GPIO6: B5.1 C55.2 GG.D3 R16.1 | length 58.1
  Top Layer w0.1: B5.1@63.119,175.768 v1(64.465,175.768) v1(83.033,175.768) ; v1(107.556,155.931) GG.D3@107.963,155.524
  MidLayer4 w0.1: v1(83.033,175.768) 101.702,157.099 106.947,157.099 107.175,156.87 107.175,156.312 v1(107.556,155.931)
  Bottom Layer w0.1: v1(64.465,175.768) 64.527,175.83 C55.2@64.527,178.054 R16.1@66.714,178.054
GPIO7: B6.1 C56.2 GG.C11 R17.1 | length 66.1
  Top Layer w0.1: B6.1@63.119,166.497 v1(64.465,166.497) ; v1(64.527,163.271) 64.656,163.143 114.327,163.143 114.91,162.56 114.91,156.871 GG.C11@114.363,156.324
  Bottom Layer w0.1: v1(64.465,166.497) v1@64.527,166.559 ; v1(64.527,163.271) v1@64.527,166.559 ; R17.1@66.714,168.656 C56.2@64.527,168.656 v1@64.527,166.559
GPIO8: B7.1 C57.2 GG.L11 R18.1 | length 117.2
  Top Layer w0.1: B7.1@63.119,157.226 v1(64.465,157.226) ; GG.L11@114.363,149.924 114.769,149.924 v1(115.164,149.53)
  Mid-Layer 3 w0.1: v1(64.527,154.813) 70.432,154.813 99.296,125.949 99.296,116.639 101.972,113.964 113.544,113.964 115.164,115.584 v1(115.164,149.53)
  Bottom Layer w0.1: v1(64.465,157.226) v1@64.527,157.288 ; v1(64.527,154.813) v1@64.527,157.288 ; R18.1@66.714,159.131 66.206,159.639 C57.2@64.527,159.639 v1@64.527,157.288
GPIO9: B8.1 C58.2 GG.K11 R19.1 | length 58.7
  Top Layer w0.1: B8.1@63.119,147.955 v1(64.465,147.955) ; GG.K11@114.363,150.724 114.363,150.52 114.554,150.52 v1(114.757,150.317)
  Mid-Layer 1 w0.1: v1(108.356,148.996) 108.356,149.403 108.89,149.936 114.249,149.936 114.63,150.317 v1(114.757,150.317)
  MidLayer4 w0.1: v1(64.527,148.26) 66.203,149.936 107.823,149.936 108.356,149.403 v1(108.356,148.996)
  Bottom Layer w0.1: v1(64.465,147.955) 64.527,148.017 v1(64.527,148.26) C58.2@64.527,150.114 R19.1@66.714,150.114
GPIO10: GG.J9 GPIO.1 | length 36.5
  Top Layer w0.1: GG.J9@112.763,151.524 v1(113.157,151.13)
  Mid-Layer 1 w0.1: v1(113.157,151.13) 113.589,151.562 141.275,151.562 143.561,149.276 146.507,149.276 GPIO.1@147.574,148.209
GPIO11: GG.J10 GPIO.2 | length 32.8
  Top Layer w0.1: GG.J10@113.563,151.524 113.957,151.13 v1(113.97,151.13)
  MidLayer4 w0.1: v1(113.97,151.13) 142.113,151.13 GPIO.2@145.034,148.209
GPIO12: GG.H8 GPIO.3 | length 36.6
  Top Layer w0.1: GG.H8@111.963,152.324 v1(112.37,151.917)
  Mid-Layer 1 w0.1: v1(112.37,151.917) 112.776,152.324 115.646,152.324 115.951,152.019 146.304,152.019 GPIO.3@147.574,150.749
GPIO13: GG.B5 GPIO.4 | length 51.2
  Top Layer w0.1: v1(109.188,157.499) GG.B5@109.563,157.124
  Mid-Layer 1 w0.1: v1(109.188,157.499) 109.537,157.15 110.134,157.15 110.338,156.947 110.338,155.045 110.947,154.435 117.3,154.435 117.807,154.942 143.826,154.942 143.993,154.775 147.917,154.775 148.641,154.051 148.641,149.962 148.361,149.682 146.101,149.682 GPIO.4@145.034,150.749
GPIO14: GG.C5 GPIO.5 | length 41.9
  Top Layer w0.1: v1(109.169,156.718) GG.C5@109.563,156.324
  Mid-Layer 1 w0.1: v1(109.169,156.718) 109.525,156.362 109.525,154.33 109.848,154.007 143.481,154.007 143.894,154.421 146.442,154.421 GPIO.5@147.574,153.289
GPIO15: GG.C4 GPIO.6 | length 39.7
  Top Layer w0.1: GG.C4@108.763,156.324 108.941,156.324 108.941,156.489 v1(109.169,156.718)
  Mid-Layer 1 w0.1: v1(109.169,156.718) 108.788,156.718 108.788,155.169 110.82,153.137 144.882,153.137 GPIO.6@145.034,153.289
GPIO16: GG.H3 GPIO.7 | length 43.3
  Top Layer w0.1: v1(107.569,151.917) 107.772,152.121 107.963,152.121 GG.H3@107.963,152.324
  Mid-Layer 3 w0.1: v1(107.569,151.917) 107.823,151.917 108.204,152.298 114.478,152.298 115.697,151.079 139.344,151.079 142.824,154.559 146.304,154.559 GPIO.7@147.574,155.829
GPIO17: GG.J3 GPIO.8 | length 41.6
  Top Layer w0.1: v1(107.543,151.156) 107.595,151.156 GG.J3@107.963,151.524
  Mid-Layer 3 w0.1: v1(107.543,151.156) 107.188,151.511 107.188,153.01 107.29,153.111 120.193,153.111 122.911,155.829 GPIO.8@145.034,155.829
GPIO18: GG.F10 GPIO.9 | length 36.2
  Top Layer w0.1: GG.F10@113.563,153.924 v1(113.97,153.518)
  MidLayer4 w0.1: v1(113.97,153.518) 124.993,153.518 128.778,157.302 146.507,157.302 GPIO.9@147.574,158.369
GPIO19: GG.E11 GPIO.10 | length 32.2
  Top Layer w0.1: GG.E11@114.363,154.724 v1(114.757,155.118)
  Mid-Layer 1 w0.1: v1(114.757,155.118) 117.424,155.118 117.602,155.296 141.961,155.296 GPIO.10@145.034,158.369
GPIO20: GG.A7
GPIO21: GG.A10
GPIO22: GG.A11
GPIO_FPGA0: FPGA.B2 R12.2 | length 34.4
  Top Layer w0.1: v1(103.835,198.425) FPGA.B2@104.236,198.024
  Mid-Layer 1 w0.1: v1(75.785,206.985) 96.799,206.985 104.242,199.542 104.242,198.831 v1(103.835,198.425)
  Bottom Layer w0.1: v1(75.785,206.985) R12.2@75.785,208.026
GPIO_FPGA1: FPGA.A2 R13.2 | length 31.2
  Top Layer w0.1: v1(103.867,199.193) FPGA.A2@104.236,198.824
  Mid-Layer 1 w0.1: v1(76.276,197.231) 102.819,197.231 103.429,197.841 103.429,198.755 v1(103.867,199.193)
  Bottom Layer w0.1: R13.2@75.785,198.755 75.785,197.722 v1(76.276,197.231)
GPIO_FPGA2: B2.1 C52.2 FPGA.D6 R9.1 | length 66.7
  Top Layer w0.1: B2.1@63.119,205.232 v1(64.465,205.232) ; v1(107.078,196.74) 107.12,196.74 FPGA.D6@107.436,196.424
  Mid-Layer 1 w0.1: v1(62.727,206.493) 63.092,206.858 66.458,206.858 v1(66.726,206.59) ; v1(64.465,205.232) 62.357,203.124 62.357,195.504 62.865,194.996 104.445,194.996 105.867,196.418 106.756,196.418 v1(107.078,196.74)
  Bottom Layer w0.1: v1(62.727,206.493) 62.727,206.767 ; C52.2@62.727,207.518 62.727,206.767 ; v1(64.465,205.232) 62.93,206.767 62.727,206.767 ; R9.1@66.714,207.518 66.714,206.602 v1(66.726,206.59)
GPIO_FPGA3: B3.1 C53.2 FPGA.C6 R10.1 | length 50.2
  Top Layer w0.1: B3.1@63.119,195.961 v1(64.465,195.961) ; v1(107.036,197.612) 107.048,197.612 FPGA.C6@107.436,197.224
  Mid-Layer 1 w0.1: v1(64.465,195.961) 64.999,195.428 103.886,195.428 105.689,197.231 106.655,197.231 v1(107.036,197.612)
  Bottom Layer w0.1: v1(64.465,195.961) 64.527,196.023 C53.2@64.527,198.247 65.532,198.247 65.659,198.12 R10.1@66.714,198.12
GPIO_FPGA4: FPGA.B3 FPGA_GPIO.1 | length 55.5
  Top Layer w0.1: v1(104.648,198.412) FPGA.B3@105.036,198.024
  Bottom Layer w0.1: FPGA_GPIO.1@57.404,216.916 59.588,214.732 75.641,214.732 91.592,198.78 104.28,198.78 v1(104.648,198.412)
GPIO_FPGA5: FPGA.A3 FPGA_GPIO.2 | length 56.6
  Top Layer w0.1: v1(104.648,199.212) 104.685,199.212 105.036,198.861 FPGA.A3@105.036,198.824
  Bottom Layer w0.1: FPGA_GPIO.2@57.404,219.456 58.268,219.456 59.334,218.389 73.457,218.389 92.608,199.238 100.99,199.238 101.473,199.72 104.14,199.72 v1(104.648,199.212)
GPIO_FPGA6: FPGA.B4 FPGA_GPIO.3 | length 54.1
  Top Layer w0.1: v1(105.435,198.425) FPGA.B4@105.836,198.024
  Mid-Layer 3 w0.1: FPGA_GPIO.3@59.944,216.916 60.808,216.052 60.808,215.316 77.292,198.831 105.029,198.831 v1(105.435,198.425)
GPIO_FPGA7: FPGA.A4 FPGA_GPIO.4 | length 61.1
  Top Layer w0.1: FPGA_GPIO.4@59.944,219.456 61.011,220.523 71.095,220.523 82.626,208.991 105.435,208.991 105.943,208.483 105.943,203.784 105.836,203.677 FPGA.A4@105.836,198.824
GPIO_FPGA8: FPGA.C5 FPGA_GPIO.5 | length 57.5
  Top Layer w0.1: v1(106.248,197.612) FPGA.C5@106.636,197.224
  Mid-Layer 1 w0.1: FPGA_GPIO.5@62.484,216.916 64.338,215.062 97.714,215.062 105.867,206.908 105.867,197.993 v1(106.248,197.612)
GPIO_FPGA9: FPGA.A5 FPGA_GPIO.6 | length 54.2
  Top Layer w0.1: v1(106.248,199.212) FPGA.A5@106.636,198.824
  Mid-Layer 3 w0.1: FPGA_GPIO.6@62.484,219.456 63.551,218.389 63.551,215.773 64.211,215.113 90.347,215.113 v1(106.248,199.212)
GPIO_FPGA10: FPGA.B6 FPGA_GPIO.7 | length 50.8
  Top Layer w0.1: v1(107.036,198.424) FPGA.B6@107.436,198.024
  Mid-Layer 2 w0.1: FPGA_GPIO.7@65.024,216.916 67.132,214.808 86.36,214.808 93.878,207.289 98.069,207.289 105.029,200.33 105.029,199.415 105.664,198.78 106.68,198.78 v1(107.036,198.424)
GPIO_FPGA11: FPGA.A6 FPGA_GPIO.8 | length 51.4
  Top Layer w0.1: v1(107.137,199.212) 107.315,199.034 107.436,199.034 FPGA.A6@107.436,198.824
  MidLayer4 w0.1: FPGA_GPIO.8@65.024,219.456 66.51,217.97 70.714,217.97 89.852,198.831 106.756,198.831 v1(107.137,199.212)
GPIO_FPGA12: FPGA.C7 FPGA_GPIO.9 | length 56.3
  Top Layer w0.1: v1(107.848,197.612) FPGA.C7@108.236,197.224
  Mid-Layer 1 w0.1: FPGA_GPIO.9@67.564,216.916 68.631,217.983 94.691,217.983 95.098,217.576 95.098,216.052 95.504,215.646 98.984,215.646 108.229,206.4 108.229,197.993 v1(107.848,197.612)
GPIO_FPGA13: FPGA.A7 FPGA_GPIO.10 | length 49.2
  Top Layer w0.1: v1(107.467,199.593) FPGA.A7@108.236,198.824
  MidLayer4 w0.1: FPGA_GPIO.10@67.564,219.456 68.696,218.324 71.018,218.324 89.698,199.645 107.415,199.645 v1(107.467,199.593)
GPIO_FPGA14: FPGA.D8 FPGA_GPIO.11 | length 47.5
  Top Layer w0.1: v1(108.636,196.926) 108.636,196.824 FPGA.D8@109.036,196.424
  MidLayer4 w0.1: FPGA_GPIO.11@70.104,216.916 89.844,197.176 108.386,197.176 v1(108.636,196.926)
GPIO_FPGA15: FPGA.C8 FPGA_GPIO.12 | length 49.3
  Top Layer w0.1: v1(108.648,197.612) FPGA.C8@109.036,197.224
  MidLayer4 w0.1: FPGA_GPIO.12@70.104,219.456 71.088,219.456 90.006,200.538 105.937,200.538 106.472,200.003 108.176,200.003 108.229,199.949 108.229,198.031 v1(108.648,197.612)